# EAGLE board CT_schematic (EAGLE 7.6.0)

Size 100 x 80 mm. Coordinates in mm from the lower left corner, seen from the top.
Outline: 0,0 100,0 100,80 0,80 0,0
Copper layers (1*16): Top 0.035mm / dielectric 1.5mm / Bottom 0.035mm
Design rules "default": minimum track width 10mil, minimum drill 24mil, track to track 8mil, track to pad 8mil, pad to pad 8mil, via to via 8mil, smd to smd 8mil, copper to edge 40mil, drill to drill 8mil, minimum pad ring 10mil, minimum via ring 8mil, stop-mask expansion 4mil, vias tented up to drill 0mil, thermal gap 10mil

## Footprints (pad centres in the part's own frame; a part is rotated, then mirrored left to right if it is on the bottom)
C0603 = smd 0.8 x 0.8: 1 -0.762,0; 2 0.762,0
C0402 = smd 0.5 x 0.5: 1 -0.508,0; 2 0.508,0
EXV-9B = smd 2.718 x 1.778: 1 -2.108,0; 2 2.108,0
EXV-9H = smd 3.505 x 1.676: 1 -2.857,0; 2 2.857,0
L0603 = smd 0.8 x 0.8: 1 -0.762,0; 2 0.762,0
PJ-037B_PACKAGE = drill 3.7 square: 1 12,0 | drill 3.2 square: 2 6,0
R0603 = smd 0.8 x 0.8: 1 -0.762,0; 2 0.762,0
TFBGA64 = smd 0.35 x 0.35: A1 -1.75,1.75; A2 -1.25,1.75; A3 -0.75,1.75; A4 -0.25,1.75; A5 0.25,1.75; A6 0.75,1.75; A7 1.25,1.75; A8 1.75,1.75; B1 -1.75,1.25; B2 -1.25,1.25; B3 -0.75,1.25; B4 -0.25,1.25; B5 0.25,1.25; B6 0.75,1.25; B7 1.25,1.25; B8 1.75,1.25; C1 -1.75,0.75; C2 -1.25,0.75; C3 -0.75,0.75; C4 -0.25,0.75; C5 0.25,0.75; C6 0.75,0.75; C7 1.25,0.75; C8 1.75,0.75; D1 -1.75,0.25; D2 -1.25,0.25; D3 -0.75,0.25; D4 -0.25,0.25; D5 0.25,0.25; D6 0.75,0.25; D7 1.25,0.25; D8 1.75,0.25; E1 -1.75,-0.25; E2 -1.25,-0.25; E3 -0.75,-0.25; E4 -0.25,-0.25; E5 0.25,-0.25; E6 0.75,-0.25; E7 1.25,-0.25; E8 1.75,-0.25; F1 -1.75,-0.75; F2 -1.25,-0.75; F3 -0.75,-0.75; F4 -0.25,-0.75; F5 0.25,-0.75; F6 0.75,-0.75; F7 1.25,-0.75; F8 1.75,-0.75; G1 -1.75,-1.25; G2 -1.25,-1.25; G3 -0.75,-1.25; G4 -0.25,-1.25; G5 0.25,-1.25; G6 0.75,-1.25; G7 1.25,-1.25; G8 1.75,-1.25; H1 -1.75,-1.75; H2 -1.25,-1.75; H3 -0.75,-1.75; H4 -0.25,-1.75; H5 0.25,-1.75; H6 0.75,-1.75; H7 1.25,-1.75; H8 1.75,-1.75
TDFN-8/6MM = smd 0.3 x 0.75: 1 0,0; 2 0.5,0; 3 1,0; 4 1.5,0; 5 1.5,3; 6 1,3; 7 0.5,3; 8 0,3
ABLS-25.000MHZ-B2F-T = smd 5.6 x 2.8: 1 -3.81,0; 2 5.69,0
ASEK = smd 1.4 x 1: 1 -1.1,-0.8; 2 1.1,-0.8; 3 1.1,0.8; 4 -1.1,0.8
LP2954 = smd 1.6 x 0.6: 1 -2.475,1.905 | smd 1.55 x 0.6: 2 -2.475,0.635; 3 -2.475,-0.635; 4 -2.475,-1.905; 5 2.475,-1.905; 6 2.475,-0.635; 7 2.475,0.635; 8 2.475,1.905
SON-6 = smd 0.55 x 0.3: 1 -0.355,0.5 | smd 0.52 x 0.3: 2 -0.37,0; 3 -0.37,-0.5; 4 0.37,-0.5; 5 0.37,0; 6 0.37,0.5
SW_4-1437565-2 = smd 1.4 x 2.1: 1 -2.23,4.55; 2 -2.23,-4.55; 3 2.23,4.55; 4 2.23,-4.55
LGM67K-G1J2-24-Z = smd 0.8 x 1.4: A -2,0; C 0,0
NC7SZ125M5X = smd 1.3 x 0.7: 1 -1.3,0.95; 2 -1.3,0; 3 -1.3,-0.95; 4 1.3,-0.95; 5 1.3,0.95
DUMMY_PACKAGE_90 = drill 0.3: 1 0,-1; 2 1.5,-1; 3 3,-1

## Placement (x,y rotation side)
C1  1e-07  [C0603]  -33.02,49.53 0 top  (outside the outline)
C2  1e-07  [C0603]  -36.83,49.53 0 top  (outside the outline)
C3  1e-07  [C0603]  -40.64,49.53 0 top  (outside the outline)
C4  1e-07  [C0603]  -44.45,49.53 0 top  (outside the outline)
C5  4.7e-06  [C0603]  -29.21,49.53 0 top  (outside the outline)
C6  1e-07  [C0603]  -48.26,49.53 0 top  (outside the outline)
C7  1e-08  [C0603]  -52.07,49.53 0 top  (outside the outline)
C8  1e-06  [C0603]  -55.88,49.53 0 top  (outside the outline)
C9  1e-11  [C0402]  -38.1,54.61 0 top  (outside the outline)
C10  1e-11  [C0402]  -41.91,54.61 0 top  (outside the outline)
C11  1e-08  [C0402]  -45.72,54.61 0 top  (outside the outline)
C12  1e-08  [C0402]  -49.53,54.61 0 top  (outside the outline)
C13  1e-06  [EXV-9B]  -50.8,35.56 0 top  (outside the outline)
C14  2.2e-06  [EXV-9B]  -16.51,43.18 0 top  (outside the outline)
C15  1e-07  [C0402]  -53.34,54.61 0 top  (outside the outline)
C16  0.0001  [EXV-9H]  -38.1,29.21 0 top  (outside the outline)
C17  0.0001  [EXV-9H]  -49.53,29.21 0 top  (outside the outline)
C18  1e-08  [C0402]  -57.15,54.61 0 top  (outside the outline)
F1  240.0  [L0603]  -15.24,54.61 0 top  (outside the outline)
J1  PJ-037B  [PJ-037B_PACKAGE]  -27.94,7.62 0 top  (outside the outline)
R2  1000.0  [R0603]  -19.05,54.61 0 top  (outside the outline)
R4  4700.0  [R0603]  -22.86,54.61 0 top  (outside the outline)
R5  2200.0  [R0603]  -26.67,54.61 0 top  (outside the outline)
R6  2200.0  [R0603]  -30.48,54.61 0 top  (outside the outline)
R7  10000.0  [R0603]  -15.24,49.53 0 top  (outside the outline)
R8  100000.0  [R0603]  -36.83,43.18 0 top  (outside the outline)
R9  100000.0  [R0603]  -41.91,43.18 0 top  (outside the outline)
R10  164658.62  [R0603]  -31.75,43.18 0 top  (outside the outline)
R11  100000.0  [R0603]  -46.99,43.18 0 top  (outside the outline)
R12  10000.0  [R0603]  -20.32,49.53 0 top  (outside the outline)
R13  10000.0  [R0603]  -25.4,49.53 0 top  (outside the outline)
R14  9100.0  [R0603]  -34.29,54.61 0 top  (outside the outline)
R15  680000.0  [R0603]  -52.07,43.18 0 top  (outside the outline)
R16  120000.0  [R0603]  -57.15,43.18 0 top  (outside the outline)
U1  STM32L151R8H6  [TFBGA64]  -36.83,19.05 0 top  (outside the outline)
U2  24AA16-I/MC  [TDFN-8/6MM]  -21.59,19.05 0 top  (outside the outline)
U3  ABLS-25.000MHZ-B2F-T  [ABLS-25.000MHZ-B2F-T]  -26.67,36.83 0 top  (outside the outline)
U4  ASEK-32.768KHz-ECST  [ASEK]  -29.21,29.21 0 top  (outside the outline)
U5  LP2954AIMX/NOPB  [LP2954]  -53.34,19.05 0 top  (outside the outline)
U6  TPS3895ADRYR  [SON-6]  -20.32,58.42 0 top  (outside the outline)
U7  4-1437565-2  [SW_4-1437565-2]  -44.45,6.35 0 top  (outside the outline)
U8  Q65110A2395  [LGM67K-G1J2-24-Z]  -38.1,36.83 0 top  (outside the outline)
U9  nc7sz125m5x  [NC7SZ125M5X]  -24.13,43.18 0 top  (outside the outline)
U10  Dummy  [DUMMY_PACKAGE_90]  -17.78,59.69 0 top  (outside the outline)

## Library data of the parts
C1-C18 F1 J1 R2 R4-R16 U1-U10 = circuit_tree

## Nets
CLK_CRYSTAL_U1_C1: C9.1 U1.C1 U3.1
CLK_CRYSTAL_U1_D1: C10.1 U1.D1 U3.2
CLK_U1_A1: U1.A1 U4.3
GND: C1.2 C2.2 C3.2 C4.2 C5.2 C6.2 C7.2 C8.2 C9.2 C10.2 C11.2 C12.2 C13.2 C14.2 C15.2 C16.2 C17.2 C18.2 J1.2 R2.2 R7.2 R11.2 R14.2 R16.2 U1.C2 U1.D4 U1.D5 U1.D6 U1.F1 U2.4 U2.7 U4.2 U5.4 U6.2 U8.C U9.1 U9.3 U10.1
NET_U1_A3: R6.1 U1.A3 U2.5
NET_U1_B2: C6.1 U1.B2
NET_U1_B3: R5.1 U1.B3 U2.6
NET_U1_B4: R7.1 U1.B4
NET_U1_E1: R4.1 U1.E1 U9.4
NET_U1_H1: C7.1 C8.1 F1.1 U1.G1 U1.H1
NET_U1_H7: U8.A
NET_U1_H8: U7.3 U7.4
NET_U5_3: R9.1 U5.3
NET_U5_5: R8.1 U5.5
NET_U5_7: R10.2 R11.1 U5.7
NET_U6_1: R13.1 R14.1 U6.1
NET_U6_3: R15.2 R16.1 U6.3
NET_U6_4: R12.1 U6.4 U9.2
NET_U7_1: R2.1 U7.1 U7.2
PROC_TIM2_CH1: U1.A6 U10.3
PROC_TIM2_CH3: U1.F3 U10.2
VCC_S1_5V6: C13.1 C16.1 C17.1 J1.1 R9.2 U5.8
VCC_TIER1_3V3: C1.1 C2.1 C3.1 C4.1 C5.1 C11.1 C12.1 C14.1 C15.1 C18.1 F1.2 R4.2 R5.2 R6.2 R8.2 R10.1 R12.2 R13.2 R15.1 U1.D2 U1.E4 U1.E5 U1.E6 U2.8 U4.4 U5.1 U6.6 U9.5

## Tracks (layer width: path | path; a pad name or v marks a point on that pad's centre or on a via)
CLK_CRYSTAL_U1_C1  (2 unrouted)
CLK_CRYSTAL_U1_D1  (2 unrouted)
CLK_U1_A1  (1 unrouted)
GND  (37 unrouted)
NET_U1_A3  (2 unrouted)
NET_U1_B2  (1 unrouted)
NET_U1_B3  (2 unrouted)
NET_U1_B4  (1 unrouted)
NET_U1_E1  (2 unrouted)
NET_U1_H1  (4 unrouted)
NET_U1_H8  (1 unrouted)
NET_U5_3  (1 unrouted)
NET_U5_5  (1 unrouted)
NET_U5_7  (2 unrouted)
NET_U6_1  (2 unrouted)
NET_U6_3  (2 unrouted)
NET_U6_4  (2 unrouted)
NET_U7_1  (2 unrouted)
PROC_TIM2_CH1  (1 unrouted)
PROC_TIM2_CH3  (1 unrouted)
VCC_S1_5V6  (5 unrouted)
VCC_TIER1_3V3  (27 unrouted)